# EAGLE board pcb (EAGLE 9.1.3)
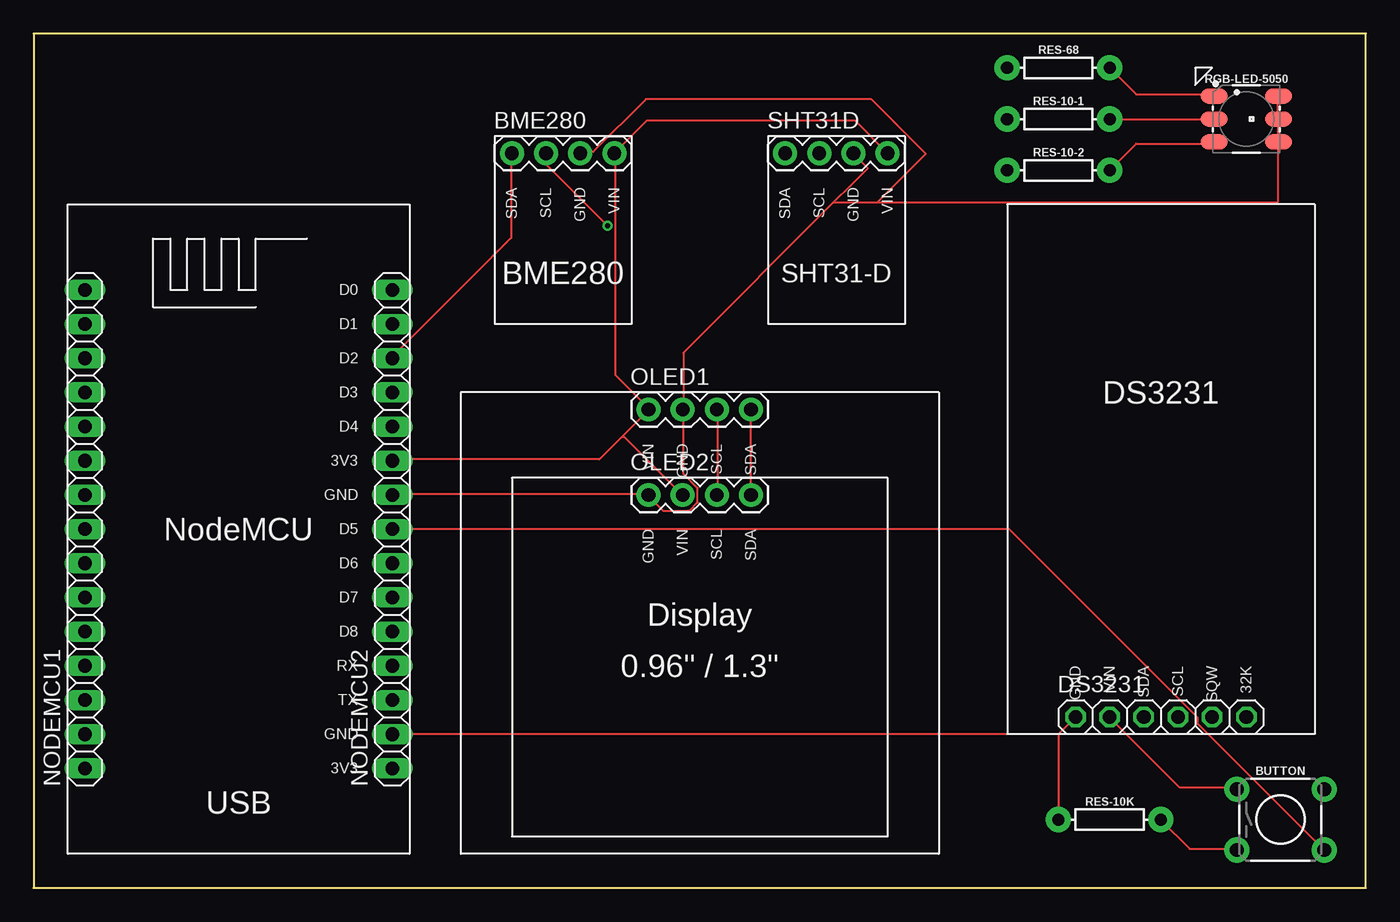
[diagram p0: board, top side]
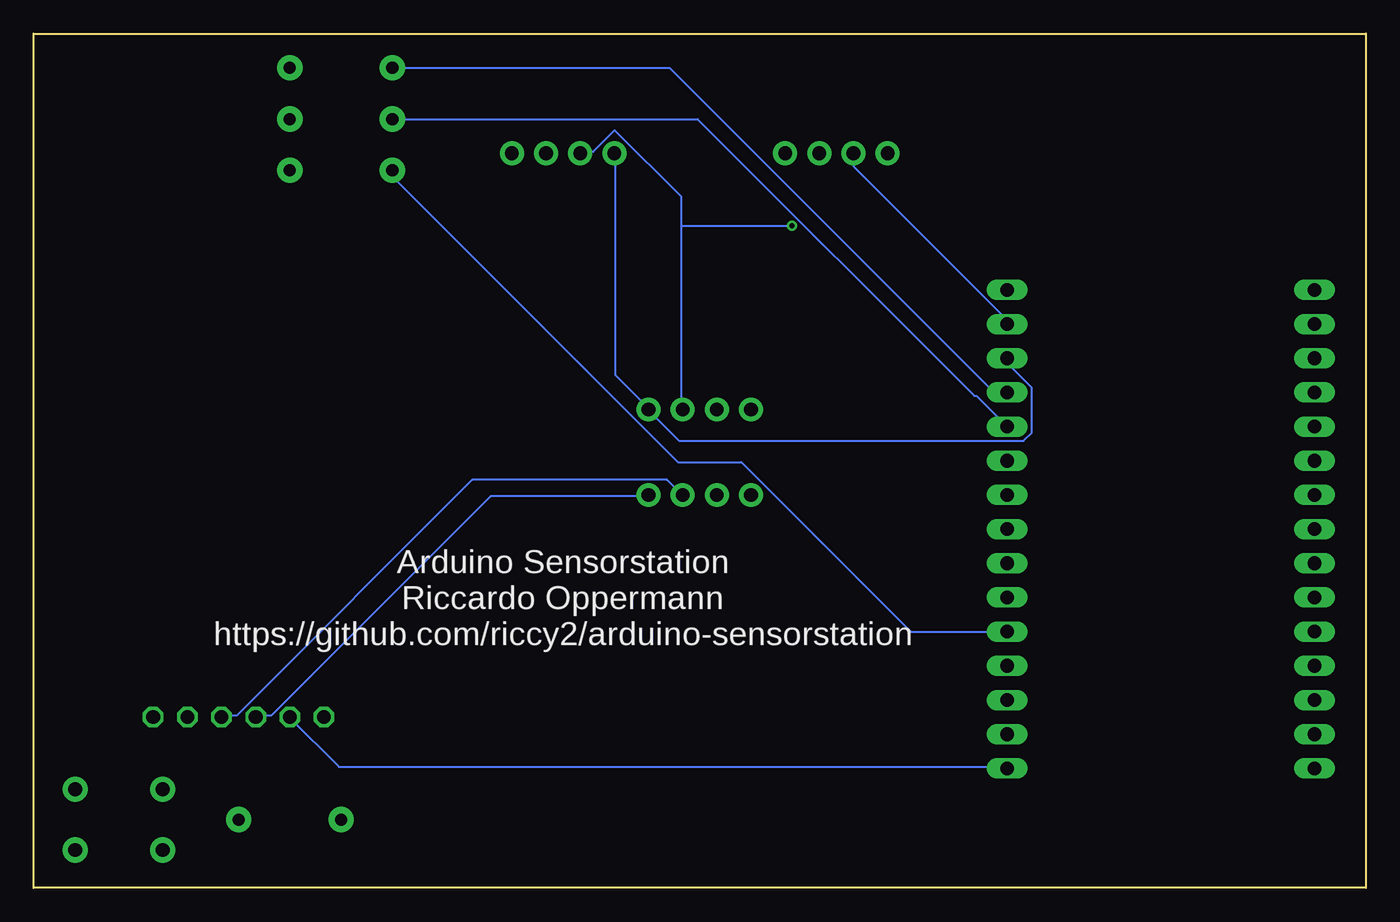
[diagram p1: board, bottom side, seen from below]

Size 99.06 x 63.5 mm. Coordinates in mm from the lower left corner, seen from the top.
Outline: 0,0 99.06,0 99.06,63.5 0,63.5 0,0
Copper layers (1*16): Top 0.035mm / dielectric 1.5mm / Bottom 0.035mm
Design rules "default": minimum track width 6mil, minimum drill 0.35mm, track to track 6mil, track to pad 6mil, pad to pad 6mil, via to via 6mil, smd to smd 6mil, copper to edge 40mil, drill to drill 6mil, minimum pad ring 10mil, minimum via ring 8mil, stop-mask expansion 4mil, vias tented up to drill 0mil, thermal gap 10mil

## Footprints (pad centres in the part's own frame; a part is rotated, then mirrored left to right if it is on the bottom)
1X04-BIG = drill 1.016 pad 1.778: 1 0,0; 2 2.54,0; 3 5.08,0; 4 7.62,0
TACTILE_SWITCH_PTH_6.0MM = drill 1.016 pad 1.88: 1 -3.251,2.261; 2 3.251,2.261; 3 -3.251,-2.261; 4 3.251,-2.261
1X06 = drill 1.016 octagon: 1 -6.35,0; 2 -3.81,0; 3 -1.27,0; 4 1.27,0; 5 3.81,0; 6 6.35,0
1X15 = drill 1.016 long: 1 -17.78,0; 2 -15.24,0; 3 -12.7,0; 4 -10.16,0; 5 -7.62,0; 6 -5.08,0; 7 -2.54,0; 8 0,0; 9 2.54,0; 10 5.08,0; 11 7.62,0; 12 10.16,0; 13 12.7,0; 14 15.24,0; 15 17.78,0
AXIAL-0.3 = drill 0.9 pad 1.88: P$1 -3.81,0; P$2 3.81,0
LED-TRICOLOR-5050 = smd 2 x 1.1: 1 -2.4,1.7; 2 -2.4,0; 3 -2.4,-1.7; 4 2.4,-1.7; 5 2.4,0; 6 2.4,1.7

## Placement (x,y rotation side)
BME280  [1X04-BIG]  35.56,54.61 0 top  (not fitted)
BUTTON  [TACTILE_SWITCH_PTH_6.0MM]  92.71,5.08 0 top
DS3231  [1X06]  83.82,12.7 0 top  (not fitted)
NODEMCU1  [1X15]  3.81,26.67 90 top  (not fitted)
NODEMCU2  [1X15]  26.67,26.67 90 top  (not fitted)
OLED1  [1X04-BIG]  45.72,35.56 0 top  (not fitted)
OLED2  [1X04-BIG]  45.72,29.21 0 top  (not fitted)
RES-10-1  10  [AXIAL-0.3]  76.2,57.15 0 top
RES-10-2  2  [AXIAL-0.3]  76.2,53.34 0 top
RES-10K  10K  [AXIAL-0.3]  80.01,5.08 0 top
RES-68  68  [AXIAL-0.3]  76.2,60.96 0 top
RGB-LED-5050  [LED-TRICOLOR-5050]  90.17,57.15 0 top
SHT31D  [1X04-BIG]  55.88,54.61 0 top  (not fitted)

## Library data of the parts
BME280 DS3231 NODEMCU1 NODEMCU2 OLED1 OLED2 SHT31D = adafruit
BUTTON = SparkFun-Switches
RES-10-1 RES-10-2 RES-10K RES-68 = SparkFun-Resistors
RGB-LED-5050 = SparkFun-LED

## Nets
S$1: RES-68.P$2 RGB-LED-5050.1
S$2: RES-10-1.P$2 RGB-LED-5050.2
S$3: RES-10-2.P$2 RGB-LED-5050.3
S$4: BME280.2 DS3231.4 NODEMCU2.14 OLED1.3 OLED2.3 SHT31D.2
S$5: BME280.1 DS3231.3 NODEMCU2.13 OLED1.4 OLED2.4 SHT31D.1
S$6: NODEMCU2.12 RES-68.P$1
S$7: NODEMCU2.11 RES-10-1.P$1
S$8: NODEMCU2.5 RES-10-2.P$1
S$9: BME280.4 NODEMCU2.10 OLED1.1 OLED2.2 SHT31D.4
S$10: BME280.3 NODEMCU2.9 OLED1.2 OLED2.1 RGB-LED-5050.4 RGB-LED-5050.5 RGB-LED-5050.6 SHT31D.3
S$11: BUTTON.1 DS3231.2 NODEMCU2.1
S$12: BUTTON.3 RES-10K.P$2
S$13: DS3231.1 NODEMCU2.2 RES-10K.P$1
S$14: BUTTON.4 NODEMCU2.8

## Tracks (layer width: path | path; a pad name or v marks a point on that pad's centre or on a via)
S$1
  Top 0.152: RES-68.P$2 81.99,58.98 87.63,58.98 RGB-LED-5050.1
S$2
  Top 0.152: RES-10-1.P$2 87.63,57.15 RGB-LED-5050.2
S$3
  Top 0.152: RES-10-2.P$2 81.99,55.32 87.63,55.32 RGB-LED-5050.3
S$4  (via drill 0.35)
  Top 0.152: OLED1.3 50.9,35.51 50.9,29.26 OLED2.3 | v42.67,49.23 38.1,53.8 38.1,54.56 BME280.2
  Bottom 0.152: NODEMCU2.14 26.67,42.22 38.1,53.65 38.1,54.56 BME280.2 | DS3231.4 85.04,12.8 83.97,12.8 66.45,30.33 51.97,30.33 50.9,29.26 OLED2.3 | 50.9,49.23 50.9,35.66 OLED1.3 | 50.9,49.23 50.9,51.36 55.85,56.31 57.45,54.71 58.37,54.71 SHT31D.2 | 50.9,49.23 v42.67,49.23
S$5
  Top 0.152: NODEMCU2.13 26.67,39.47 35.51,48.31 35.51,54.56 BME280.1 | OLED1.4 53.34,35.51 53.34,29.26 OLED2.4
  Bottom 0.152: DS3231.3 82.45,12.8 81.38,12.8 65.08,29.11 53.34,29.11 OLED2.4 | SHT31D.1 55.78,54.56 55.78,38.1 53.34,35.66 OLED1.4 53.34,35.51 51.05,33.22 25.45,33.22 24.84,33.83 24.84,37.19 26.67,39.01 26.67,39.32 NODEMCU2.13
S$6
  Bottom 0.152: RES-68.P$1 51.77,60.96 27.69,36.88 26.67,36.88 NODEMCU2.12
S$7
  Bottom 0.152: NODEMCU2.11 28.96,36.58 29.11,36.58 49.68,57.15 RES-10-1.P$1
S$8
  Bottom 0.152: NODEMCU2.5 33.83,19.05 46.43,31.65 51.16,31.65 72.39,52.88 RES-10-2.P$1
S$9
  Top 0.152: 43.74,33.53 45.72,35.51 OLED1.1 45.72,35.66 43.28,38.1 43.28,54.56 BME280.4 43.28,54.71 45.62,57.05 61.06,57.05 SHT31D.4 | 43.74,33.53 42.06,31.85 26.67,31.85 NODEMCU2.10 | 43.74,33.53 43.89,33.53 48.16,29.26 OLED2.2
S$10
  Top 0.152: NODEMCU2.9 26.67,29.26 45.72,29.26 OLED2.1 45.72,29.11 46.79,28.04 48.77,28.04 49.38,28.65 49.38,29.72 48.31,30.79 48.31,35.51 OLED1.2 48.31,35.66 48.31,39.78 59.49,50.95 | 92.51,57.15 92.51,56.24 | 92.51,56.24 92.51,55.47 RGB-LED-5050.4 | 92.51,57.15 RGB-LED-5050.5 92.51,57.15 | 92.51,57.15 92.51,58.83 RGB-LED-5050.6 | 59.49,50.95 92.51,50.95 92.51,56.24 | 59.49,50.95 62.74,50.95 66.34,54.56 62.28,58.62 45.52,58.62 41.6,54.71 40.69,54.71 BME280.3 | SHT31D.3 60.96,54.56 62.03,53.49 60.76,52.22 59.49,50.95
S$11
  Top 0.152: BUTTON.1 89.46,7.47 85.19,7.47 80.01,12.65 DS3231.2
  Bottom 0.152: NODEMCU2.1 26.67,8.99 76.35,8.99 80.01,12.65 DS3231.2
S$12
  Top 0.152: BUTTON.3 89.46,2.9 85.95,2.9 83.82,5.03 RES-10K.P$2
S$13
  Top 0.152: 76.2,11.43 NODEMCU2.2 | 76.2,11.43 77.42,12.65 DS3231.1 | 76.2,11.43 76.2,5.18 RES-10K.P$1
S$14
  Top 0.152: NODEMCU2.8 72.54,26.67 86.56,12.65 86.56,12.19 95.86,2.9 BUTTON.4

## Text on the board
tPlace: SDA | SCL | GND | VIN | SDA | SCL | GND | VIN | BME280 | SHT31-D | D0 | D1 | D2 | D3 | DS3231 | D4 | VIN | GND | SCL | SDA | 3V3 | GND | NodeMCU | D5 | GND | VIN | SCL | SDA | D6 | D7 | Display | D8 | RX | 0.96" / 1.3" | GND | VIN | SDA | SCL | SQW | 32K | TX | GND | 3V3 | USB
bPlace: Arduino Sensorstation / Riccardo Oppermann / https://github.com/riccy2/arduino-sensorstation